# Altium PCB BMS-6S-1B_PCB.PcbDoc
Units mil, origin at the board's own origin, x right, y up, seen from the top; angles counter-clockwise.
Board outline 2373.06 x 1980.17 mil, 2 copper layers (Top Layer, Bottom Layer); 61 components, 44 nets, 186 pads, 345 vias.
Unrouted connection lines stored in the file: 3.
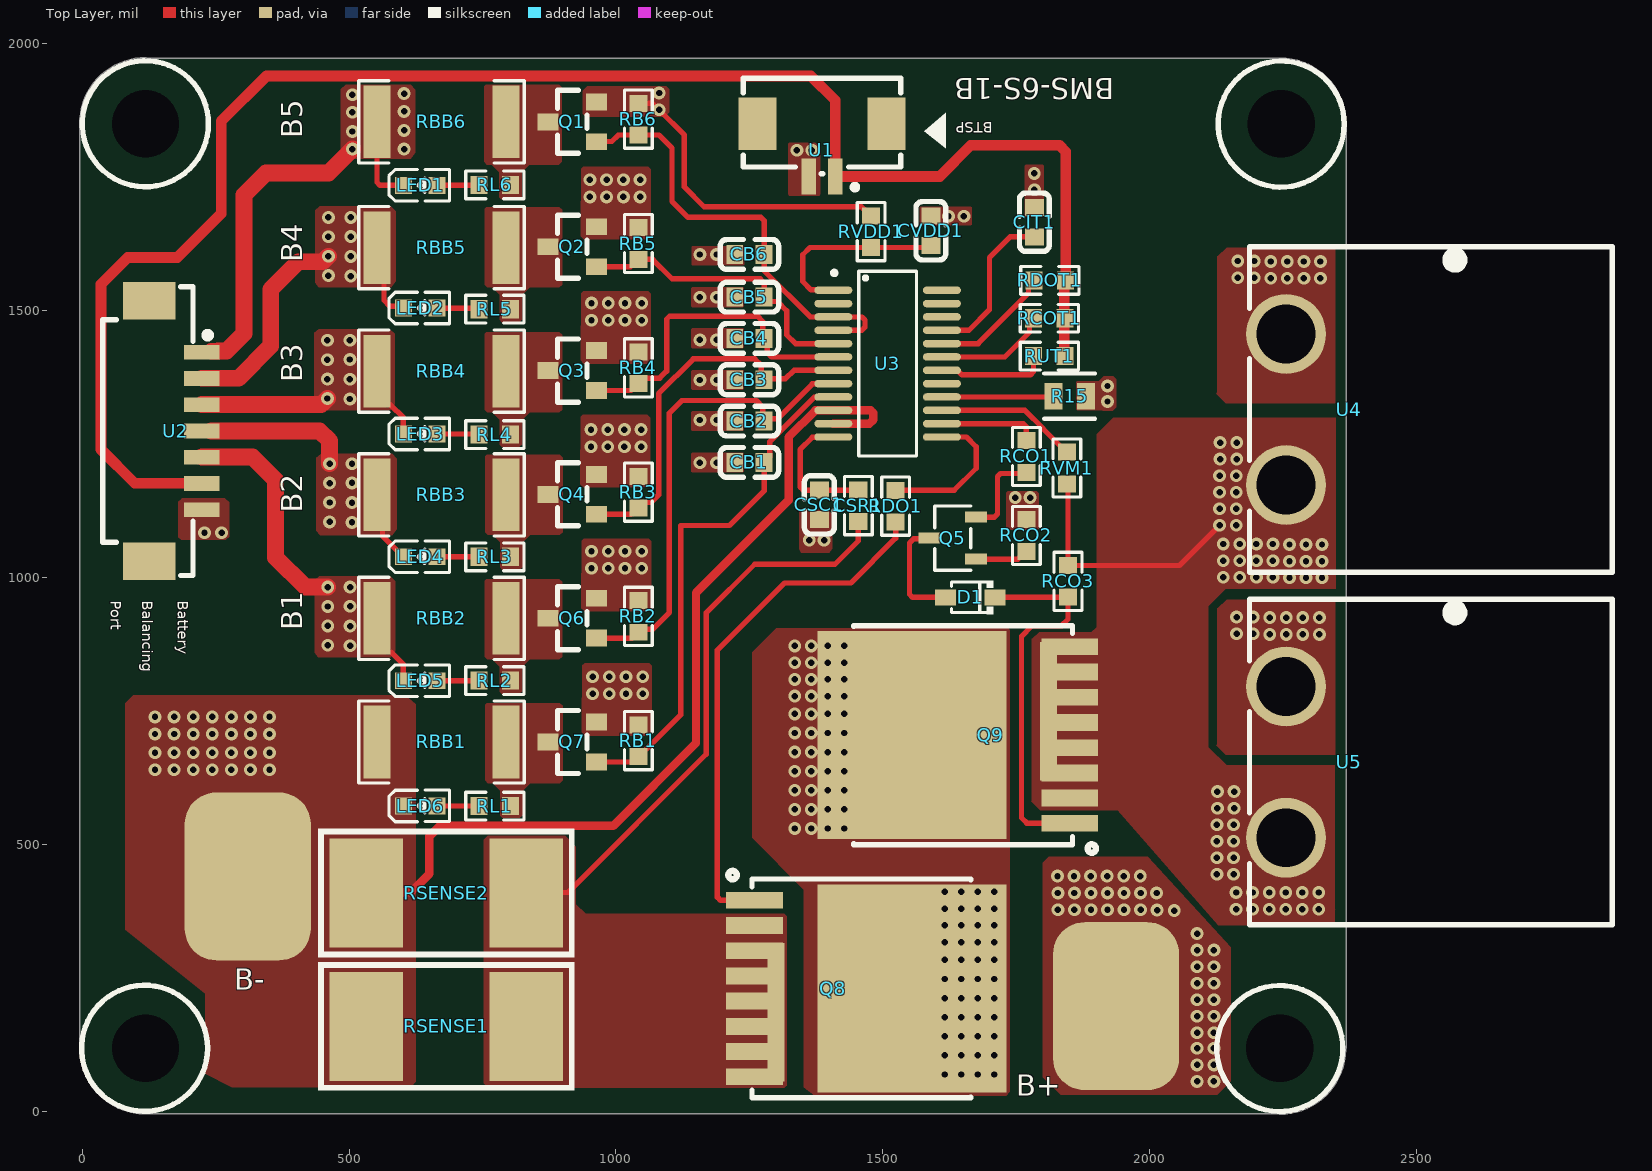
[diagram p0: Top Layer view]
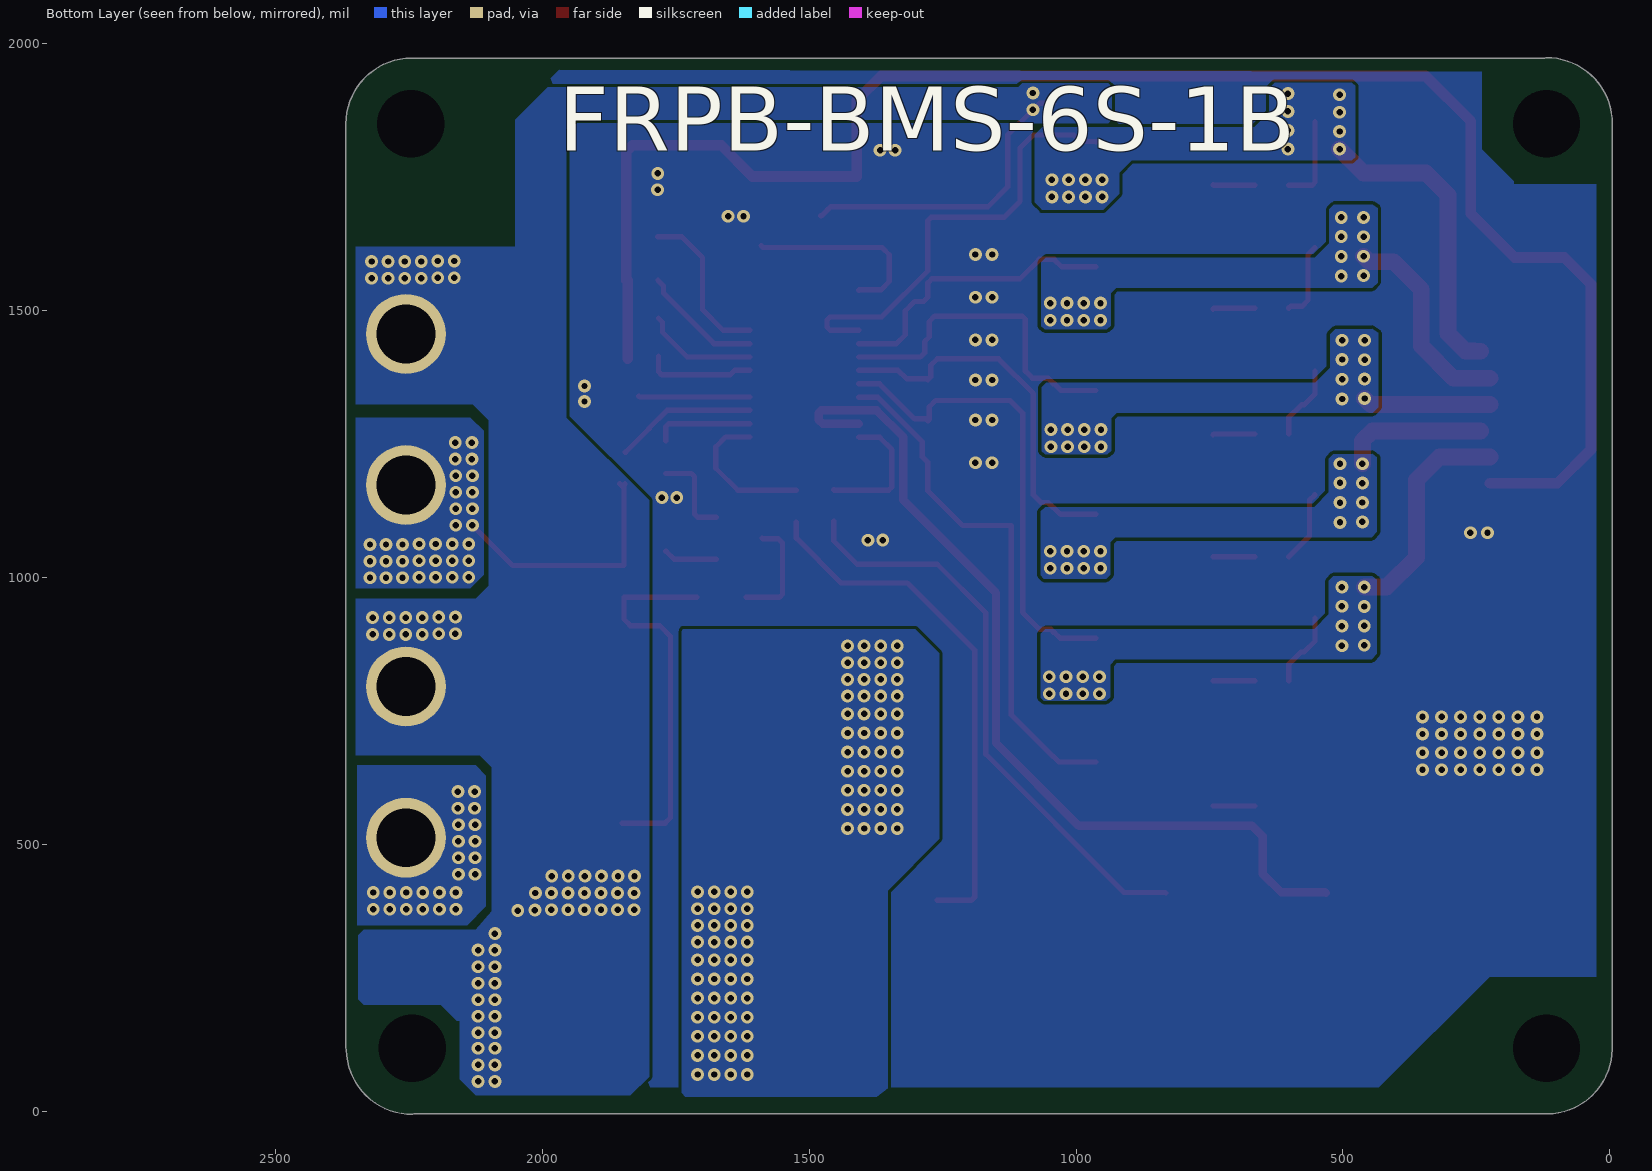
[diagram p1: Bottom Layer view, seen from below]

## Layer stack, top to bottom
Top Solder: solder mask 0.4, Solder Resist, Dk 3.5
Top Layer: signal copper 1.4
Dielectric 1: dielectric 12.6, FR-4, Dk 4.8
Bottom Layer: signal copper 1.4
Bottom Solder: solder mask 0.4, Solder Resist, Dk 3.5

## Board outline
116.75,-4.83 cw(c118.11,118.11) -4.83,116.75 -5.01,118.11 -5.01,1850.39 -4.84,1851.72 cw(c118.11,1851.39) 119.03,1974.34 121.74,1973.52 2244.09,1973.52 2245.42,1973.34 cw(c2245.09,1850.39) 2368.04,1850.39 2368.02,1849.04 2368.01,118.11 2367.02,115.12 cw(c2244.09,117.11) 2243.18,-5.83 2240.47,-5.01

## Design rules (kind name [scope] priority, off if disabled: settings)
Clearance [All] p1: gap=6 ignorepadtopadclearanceinfootprint=TRUE
HoleSize [All] p1: absolutevalues=TRUE maxlimit=200 minlimit=1 maxpercent=80.000 minpercent=20.000
HoleToHoleClearance [All] p1: gap=3 allowstackedmicrovias=TRUE
MinimumSolderMaskSliver [All] p1: minsoldermaskwidth=3
PolygonConnect [All] p1: connectstyle=Direct reliefconductorwidth=10 reliefentries=4 polygonreliefangle="90 Angle" airgapwidth=10
RoutingVias [All] p1: holewidth=12.01 width=24.02 viastyle="Through Hole" minholewidth=12 minwidth=24 maxholewidth=28 maxwidth=50
SilkToSilkClearance [All] p1: silktosilkclearance=2
SilkToSolderMaskClearance [All] p1: minsilkscreentomaskgap=2 clearancetoexposedcopper=TRUE
SolderMaskExpansion [All] p1: expansion=2 istentingtop=TRUE
SupplyNets "Schematic Supply Nets" [InNet('GND')] p1: voltage=0.000
Width [All] p1: maxlimit=31.5 minlimit=10 preferedwidth=10
25 further rules are at their usual default settings.

## Components (designator, comment, footprint, x,y, rotation, side; value= is the part's Value field where it differs from the comment)
CB1 "100nF" C0603 1250,1216 r0 top
CB2 "100nF" C0603 1250,1293.4 r0 top
CB3 "100nF" C0603 1250,1370.8 r0 top
CB4 "100nF" C0603 1250,1448.2 r0 top
CB5 "100nF" C0603 1250,1525.6 r0 top
CB6 "100nF" C0603 1250,1605.6 r0 top (schematic designator CB5)
CIT1 "100nF" C0603 1784,1666 r270 top
CSC1 "100nF" C0603 1381,1136.44 r90 top
CSR1 "1kR" R0603#1 1454,1135 r90 top value=1k
CVDD1 "100nF" C0603 1590,1650 r270 top
D1 "1SS355_C8485" SOD-323_L1.8-W1.3-LS2.5-RD 1664,963 r180 top
LED1 "NCD0603O1" LED0603-RD#1 633,1735 r0 top
LED2 "NCD0603O1" LED0603-RD#2 633,1504.99 r0 top
LED3 "NCD0603O1" LED0603-RD#2 633,1269 r0 top
LED4 "NCD0603O1" LED0603-RD#2 633,1039 r0 top
LED5 "NCD0603O1" LED0603-RD#2 633,806.79 r0 top
LED6 "NCD0603O1" LED0603-RD#2 633,572 r0 top
Q1 "AO3401A_C15127" SOT-23_L2.9-W1.3-P1.90-LS2.4-BR#1 918,1854 r0 top
Q2 "AO3401A_C15127" SOT-23_L2.9-W1.3-P1.90-LS2.4-BR#2 918,1620 r0 top
Q3 "AO3401A_C15127" SOT-23_L2.9-W1.3-P1.90-LS2.4-BR#3 918,1388 r0 top
Q4 "AO3401A_C15127" SOT-23_L2.9-W1.3-P1.90-LS2.4-BR#3 918,1156 r0 top
Q5 "2N5401S" SOT-23-3_L2.9-W1.5-P2.0-LS2.5-BR 1631,1074 r0 top
Q6 "AO3401A_C15127" SOT-23_L2.9-W1.3-P1.90-LS2.4-BR#2 918,924 r0 top
Q7 "AO3401A_C15127" SOT-23_L2.9-W1.3-P1.90-LS2.4-BR#3 918,692 r0 top
Q8 "IPLU250N04S4-1R7" PG-HSOF-8_L10.5-W10.1-P1.20-LS11.9-TL 1407.36,230.01 r0 top
Q9 "IPLU250N04S4-1R7" PG-HSOF-8_L10.5-W10.1-P1.20-LS11.9-TL 1702.64,704.99 r180 top
R15 "10kR" FP-ESR10-IPC_C 1850,1340 r0 top
RB1 "470R" R0603#1 1042,694.34 r270 top value=470
RB2 "470R" R0603#1 1042,927.27 r270 top value=470
RB3 "470R" R0603#1 1042,1160.2 r270 top value=470
RB4 "470R" R0603#1 1042,1393.14 r270 top value=470
RB5 "470R" R0603#1 1042,1626.07 r270 top value=470
RB6 "470R" R0603#1 1042,1859 r270 top value=470
RBB1 "47R" R2512 673,692 r0 top value=47
RBB2 "47R" R2512 673,923.6 r0 top value=47
RBB3 "47R" R2512 673,1155.2 r0 top value=47
RBB4 "47R" R2512 673,1386.8 r0 top value=47
RBB5 "47R" R2512 673,1618.4 r0 top value=47
RBB6 "47R" R2512 673,1854 r0 top value=47
RCO1 "1kR" R0603#1 1769,1227 r270 top value=1k
RCO2 "3.3MR" R0603#1 1769,1079 r270 top value=3.3M
RCO3 "3.3MR" R0603#1 1847,993 r270 top value=3.3M
RCOT1 "43kR" R0603#1 1812,1486 r0 top value=43k
RDO1 "1kR" R0603#1 1524,1134 r90 top value=1k
RDOT1 "22kR" R0603#1 1813,1557 r0 top value=22k
RL1 "100R" R0603#2 773,572 r0 top value=100
RL2 "100R" R0603#1 773,807 r0 top value=100
RL3 "100R" R0603#3 773,1039 r0 top value=100
RL4 "100R" R0603#3 773,1268 r0 top value=100
RL5 "100R" R0603#1 773,1503 r0 top value=100
RL6 "100R" R0603#1 773,1736 r0 top value=100
RSENSE1 "4mR" R3920 682,159 r0 top value=4m
RSENSE2 "4mR" R3920 682,409 r0 top value=4m
RUT1 "360kR" R0603#1 1812,1415 r0 top value=360k
RVDD1 "1kR" R0603#3 1478,1648.34 r90 top value=1k
RVM1 "200kR" R0603#1 1845,1205.34 r90 top value=200k
U1 "WAFER-MX1.25-2PWB" CONN-SMD_2P-P1.25_XUNPU_WAFER-MX1.25-2PWB 1386,1801 r180 top
U2 "ZX-MX1.25-7PWT" CONN-SMD_7P-P1.25_ZX-MX1.25-7PWT 174.8,1274.64 r90 top
U3 "CW1274ALBS" SSOP-24_L8.7-W3.9-P0.64-LS6.0-BL 1509,1401 r270 top
U4 "XT60PW-F" TH_2P-XT60PW-F 2373.89,1315 r270 top
U5 "XT60PW-F" TH_2P-XT60PW-F 2373.89,654.25 r270 top

## Footprints (in the part's own frame and the unit in brackets; to place one, negate y for a bottom-side part, rotate by r counter-clockwise, add the part's x,y. Pads: shape width x height; smd on the part's side, far side on the other; paste and mask are expansions set on the pad)
C0603 [mm]
  rect 0.8x0.9 smd mask+0.025: 1(-0.7,0) 2(0.7,0)
  silkscreen extent -1.39,-0.71 1.39,0.71
CONN-SMD_2P-P1.25_XUNPU_WAFER-MX1.25-2PWB [mm]
  rect 0.7x1.7 smd paste+0 mask+0.05: 1(-0.625,1.25) 2(0.625,1.25)
  rect 1.8x2.5 smd paste+0 mask+0.05: 3(3.075,-1.25) 4(-3.075,-1.25)
  silkscreen extent -3.75,-3.43 3.75,1.88
CONN-SMD_7P-P1.25_ZX-MX1.25-7PWT [mm]
  rect 0.7x1.7 smd paste+0 mask+0.05: 1(3.75,-1.25) 2(2.5,-1.25) 3(1.25,-1.25) 4(0,-1.25) 5(-1.25,-1.25) 6(-2.5,-1.25) 7(-3.75,-1.25)
  rect 1.8x2.5 smd paste+0 mask+0.05: 8(-6.2,1.25) 9(6.2,1.25)
  silkscreen extent -6.88,-1.67 6.87,3.48
FP-ESR10-IPC_C [mil]
  rect 33.79x49.69 smd paste+0 mask+0: 1(-30.59,0) 2(30.59,0)
  silkscreen extent -47,-42 47,42, body extent -51,-31 51,31, height 10
LED0603-RD#1 [mm]
  rect 0.8x0.8 smd mask+0.051: 1(-0.799,0)
  rect 0.8x0.8 smd mask+0.025: 2(0.799,0)
  silkscreen extent -1.49,-0.75 1.39,0.76
LED0603-RD#2 [mm]
  rect 0.8x0.8 smd mask+0.025: 1(-0.799,0) 2(0.799,0)
  silkscreen extent -1.49,-0.75 1.39,0.76
PG-HSOF-8_L10.5-W10.1-P1.20-LS11.9-TL [mm]
  rect 2.7x0.8 smd paste-100 mask+0.051: 1(-3.75,4.2) 2(-3.75,3) 3(-3.75,1.8) 4(-3.75,0.6) 5(-3.75,-0.6) 6(-3.75,-1.8) 7(-3.75,-3) 8(-3.75,-4.2)
  rect 0.8x6.6 smd paste-100 mask+0.051: 8(-2.734,-1.134)
  rect 9x9.9 smd paste-100 mask+0.051: 9(3.75,0)
  silkscreen extent -5,-5.2 6.54,5.6
R0603#1 [mil]
  rect 31.75x34.02 smd paste-3937.01 mask+2: 1(-29.66,0) 2(29.66,0)
  silkscreen extent -55,-26 55,26
R0603#2 [mil]
  rect 31.75x34.02 smd paste-3937.01 mask+2: 1(-29.66,0)
  rect 31.75x34.02 smd paste-3937.01 mask+3: 2(29.66,0)
  silkscreen extent -55,-26 55,26
R0603#3 [mil]
  rect 31.75x34.02 smd paste-3937.01 mask+1: 1(-29.66,0)
  rect 31.75x34.02 smd paste-3937.01 mask+2: 2(29.66,0)
  silkscreen extent -55,-26 55,26
R2512 [mil]
  rect 50.49x136.06 smd paste-3937.01 mask+2: 1(-120.72,0) 2(120.72,0)
  silkscreen extent -155,-77 155,77
R3920 [mm]
  rect 3.5x5.2 smd mask+0.025: 1(-3.81,0) 2(3.81,0)
  silkscreen extent -6.1,-3.05 6.1,3.05
SOD-323_L1.8-W1.3-LS2.5-RD [mm]
  rect 1x0.75 smd mask+0.025: 1(-1.173,0) 2(1.173,0)
  silkscreen extent -1.08,-0.8 0.9,0.8
SOT-23-3_L2.9-W1.5-P2.0-LS2.5-BR [mm]
  rect 1.037x0.532 smd mask+0.025: 1(1.101,-1) 2(1.101,1) 3(-1.101,0)
  silkscreen extent -0.86,-1.53 0.86,1.53
SOT-23_L2.9-W1.3-P1.90-LS2.4-BR#1 [mm]
  rect 1x0.8 smd mask+0.025: 1(1.15,-0.95) 2(1.15,0.95)
  rect 1x0.8 smd: 3(-1.15,0)
  silkscreen extent -0.7,-1.5 0.7,1.5
SOT-23_L2.9-W1.3-P1.90-LS2.4-BR#2 [mm]
  rect 1x0.8 smd mask+0.025: 1(1.15,-0.95) 2(1.15,0.95)
  rect 1x0.8 smd mask+0.076: 3(-1.15,0)
  silkscreen extent -0.7,-1.5 0.7,1.5
SOT-23_L2.9-W1.3-P1.90-LS2.4-BR#3 [mm]
  rect 1x0.8 smd mask+0.025: 1(1.15,-0.95) 2(1.15,0.95) 3(-1.15,0)
  silkscreen extent -0.7,-1.5 0.7,1.5
SSOP-24_L8.7-W3.9-P0.64-LS6.0-BL [mil]
  oval 14x71.06 smd: 1(-137.5,-101.77) 2(-112.5,-101.77) 3(-87.5,-101.77) 4(-62.5,-101.77) 5(-37.5,-101.77) 6(-12.5,-101.77) 7(12.5,-101.77) 8(37.5,-101.77) 9(62.5,-101.77) 10(87.5,-101.77) 11(112.5,-101.77) 12(137.5,-101.77) 13(137.5,101.77) 14(112.5,101.77) 15(87.5,101.77) 16(62.5,101.77) 17(37.5,101.77) 18(12.5,101.77) 19(-12.5,101.77) 20(-37.5,101.77) 21(-62.5,101.77) 22(-87.5,101.77) 23(-112.5,101.77) 24(-137.5,101.77)
  silkscreen extent -174,-104 173,54
TH_2P-XT60PW-F [mm]
  oval 1.3x2.2 on Mech1 paste-2539.97 mask+0.05: 1(-6.75,3) 2(6.75,3)
  round 3.8 hole 2.8 paste-2539.97 mask+0.05: 3(-3.6,-3) 4(3.6,-3)
  silkscreen extent -7.75,-4.75 7.75,12.52

## Part data
CB1 CB2 CB3 CB4 CB5 CB6 CIT1 CSC1 CVDD1: library part CMP-003-000004-1, JLCPCB Part Class="Extended Part", LCSC Part Name="100nF ?0% 50V", Manufacturer=muRata(村田), Manufacturer Part=GCJ188R71H104KA12D, Temperature Coefficient=X7R, Tolerance=10%, Voltage Rating=50V, Add into BOM=yes, Convert to PCB=yes, Datasheet=https://item.szlcsc.com/datasheet/GCJ188R71H104KA12D/172496.html, Design Item ID=GCJ188R71H104KA12D, Device=GCJ188R71H104KA12D, Source=ESM-111A.SchLib, Supplier Footprint=0603, Supplier Part=C161115, Symbol=GCJ188R71H104KA12D
CSR1 RVDD1: library part CMP-005-000004-1, JLCPCB Part Class="Basic Part", LCSC Part Name="1kO ?% 100mW ????", Manufacturer=UNI-ROYAL(厚声), Manufacturer Part=0603WAF1001T5E, Operating Temperature=-55℃~+155℃, Power(Watts)=100mW, Temperature Coefficient=?00ppm/?, Tolerance=1%, Voltage-Supply(Max)=75V, Add into BOM=yes, Convert to PCB=yes, Datasheet=https://item.szlcsc.com/datasheet/0603WAF1001T5E/21904.html, Design Item ID=0603WAF1001T5E, Device=0603WAF1001T5E, Source=ESM-111A.SchLib, Supplier Footprint=0603, Supplier Part=C21190, Symbol=0603WAF1001T5E, Type="Thick Film Resistor"
D1: library part CMP-007-000001-1, Current - Rectified=100mA, JLCPCB Part Class="Extended Part", LCSC Part Name=1SS355, Manufacturer=CJ(江苏长电/长晶), Non-Repetitive Peak Forward Surge Current=500mA, Operating Junction Temperature Range=-, Reverse Leakage Current (Ir)=100nA@80V, Voltage - DC Reverse(Vr)=80V, Voltage - Forward(Vf@If)=1.2V@100mA, Add into BOM=yes, Convert to PCB=yes, Datasheet=https://item.szlcsc.com/datasheet/1SS355/8979.html, Design Item ID=1SS355_C8485, Device=1SS355_C8485, Diode Configuration=Independent, Manufacturer Part=1SS355, Reverse Recovery Time (trr)=4ns, Source=ESM-111A.SchLib, Supplier Footprint=SOD-323, Supplier Part=C8485, Symbol=1SS355_C8485
LED1 LED2 LED3 LED4 LED5 LED6: library part CMP-008-000000-1, Emitted Color=Orange, Forward Current=20mA, Forward Voltage (VF)=1.6V~2.6V, JLCPCB Part Class="Extended Part", Lens Color=无色透明透镜, Manufacturer=国星光电, Operating Temperature=-30℃~+85℃, Power Dissipation=65mW, Add into BOM=yes, Convert to PCB=yes, Datasheet=https://atta.szlcsc.com/upload/public/pdf/source/20200820/C84269_76D7AD616B091E5B61CAF71BD9DDF26F.pdf, Design Item ID=NCD0603O1, Device=NCD0603O1, Dominant Wavelength=600nm~610nm, LCSC Part Name=NCD0603O1, Luminous Intensity=80mcd~220mcd, Manufacturer Part=NCD0603O1, Source=ESM-111A.SchLib, Supplier Footprint=0603, Supplier Part=C84269, Symbol=FC-D1608HOK-600H, Viewing Angle=130皘ISIMPORTED=TRUE
Q1 Q2 Q3 Q4 Q6 Q7: library part CMP-003-000001-1, Current - Continuous Drain(Id)=4A, Drain to Source Voltage=30V, Gate Threshold Voltage (Vgs(th))=900mV@250uA, Input Capacitance(Ciss)=645pF, JLCPCB Part Class="Basic Part", LCSC Part Name="1个P沟道 耐压:30V 电流:4A", Manufacturer=AOS, Manufacturer Part=AO3401A, Operating Temperature=-, Output Capacitance(Coss)=80pF, Reverse Transfer Capacitance (Crss@Vds)=55pF, Add into BOM=yes, Convert to PCB=yes, Datasheet=https://item.szlcsc.com/datasheet/AO3401A/15801.html, Design Item ID=AO3401A_C15127, Device=AO3401A_C15127, Gate Charge(Qg)=14nC@10V, Number="1 P-Channel", Pd - Power Dissipation=-, RDS(on)=47mΩ@10V；85mΩ@2.5V；60mΩ@4.5V, Source=ESM-111A.SchLib, Supplier Footprint=SOT-23, Supplier Part=C15127, Symbol=AO3401A, Type=-
Q5: library part CMP-003-000000-1, Collector - Emitter Voltage VCEO=160V, Current - Collector Cutoff=50nA, Current - Collector(Ic)=600mA, DC Current Gain=300@10mA,5V, Emitter-Base Voltage(Vebo)=6V, JLCPCB Part Class="Extended Part", LCSC Part Name=PNP开关晶体管, Manufacturer="TECH PUBLIC(台舟)", Pd - Power Dissipation=300mW, Transition frequency(fT)=300MHz, Add into BOM=yes, Convert to PCB=yes, Datasheet=https://item.szlcsc.com/datasheet/2N5401S/8170936.html, Design Item ID=2N5401S, Device=2N5401S, Manufacturer Part=2N5401S, Source=ESM-111A.SchLib, Supplier Footprint=SOT-23, Supplier Part=C7202978, Symbol=2N5401S, Vce Saturation(VCE(sat))=500mV@50mA,6mA
Q8 Q9: library part CMP-003-000003-1, Current - Continuous Drain(Id)=250A, Drain to Source Voltage=40V, Gate Threshold Voltage (Vgs(th))=4V@80uA, Input Capacitance(Ciss)=7.9nF, JLCPCB Part Class="Extended Part", LCSC Part Name=OptiMOS-T2功率晶体管, Manufacturer=Infineon(英飞凌), Operating Temperature=-55℃~+175℃, Output Capacitance(Coss)=1.8nF, Pd - Power Dissipation=188W, Reverse Transfer Capacitance (Crss@Vds)=105pF, Add into BOM=yes, Convert to PCB=yes, Datasheet=https://item.szlcsc.com/datasheet/IPLU250N04S4-1R7/557481.html, Design Item ID=IPLU250N04S4-1R7, Device=IPLU250N04S4-1R7, Gate Charge(Qg)=100nC@10V, Manufacturer Part=IPLU250N04S4-1R7, Number="1 N-Channel", RDS(on)=1.7mΩ@10V, Source=ESM-111A.SchLib, Supplier Footprint=HSOF-8, Supplier Part=C537068, Symbol=IPLU250N04S4-1R7, Type=N-Channel
R15: library part CMP-08839-028179-1, "10kO ?.5% 0.4W 0805 Anti-Surge Chip Resistor AEC-Q200", RoHS Compliant=Yes
RB1 RB2 RB3 RB4 RB5 RB6: library part CMP-005-000010-1, JLCPCB Part Class="Basic Part", LCSC Part Name="470O ?% 100mW ????", Manufacturer=UNI-ROYAL(厚声), Manufacturer Part=0603WAF4700T5E, Operating Temperature=-55℃~+155℃, Power(Watts)=100mW, Temperature Coefficient=?00ppm/?, Tolerance=1%, Voltage-Supply(Max)=75V, Add into BOM=yes, Convert to PCB=yes, Datasheet=https://item.szlcsc.com/datasheet/0603WAF4700T5E/23906.html, Design Item ID=0603WAF4700T5E, Device=0603WAF4700T5E, Source=ESM-111A.SchLib, Supplier Footprint=0603, Supplier Part=C23179, Symbol=0603WAF4700T5E, Type="Thick Film Resistor"
RBB1 RBB2 RBB3 RBB4 RBB5 RBB6: library part CMP-005-000003-1, JLCPCB Part Class="Extended Part", LCSC Part Name="???? 47O ?% 1W", Manufacturer=FH(风华), Manufacturer Part=RC-12K47R0FT, Operating Temperature=-55℃~+155℃, Power(Watts)=1W, Temperature Coefficient=?00ppm/?, Tolerance=1%, Voltage-Supply(Max)=200V, Add into BOM=yes, Convert to PCB=yes, Datasheet=https://item.szlcsc.com/datasheet/RC-12K47R0FT/455959.html, Design Item ID=RC-12K47R0FT, Device=RC-12K47R0FT, Source=ESM-111A.SchLib, Supplier Footprint=2512, Supplier Part=C454019, Symbol=RC-12K47R0FT, Type="Thick Film Resistor"
RCO1 RDO1: library part CMP-005-000015-1, JLCPCB Part Class="Basic Part", LCSC Part Name="1kO ?% 100mW ????", Manufacturer=UNI-ROYAL(厚声), Manufacturer Part=0603WAF1001T5E, Operating Temperature=-55℃~+155℃, Power(Watts)=100mW, Temperature Coefficient=?00ppm/?, Tolerance=1%, Voltage-Supply(Max)=75V, Add into BOM=yes, Convert to PCB=yes, Datasheet=https://item.szlcsc.com/datasheet/0603WAF1001T5E/21904.html, Design Item ID=0603WAF1001T5E, Device=0603WAF1001T5E, Source=ESM-111A.SchLib, Supplier Footprint=0603, Supplier Part=C21190, Symbol=0603WAF1001T5E, Type="Thick Film Resistor"
RCO2 RCO3: library part CMP-005-000018-1, JLCPCB Part Class="Extended Part", LCSC Part Name="3.3MO ?% 100mW ????", Manufacturer=UNI-ROYAL(厚声), Manufacturer Part=0603WAF3304T5E, Operating Temperature=-55℃~+155℃, Power(Watts)=100mW, Temperature Coefficient=?00ppm/?, Tolerance=1%, Voltage-Supply(Max)=75V, Add into BOM=yes, Convert to PCB=yes, Datasheet=https://item.szlcsc.com/datasheet/0603WAF3304T5E/26839.html, Design Item ID=0603WAF3304T5E, Device=0603WAF3304T5E, Source=ESM-111A.SchLib, Supplier Footprint=0603, Supplier Part=C26096, Symbol=0603WAF3304T5E, Type="Thick Film Resistor"
RCOT1: library part CMP-005-000009-1, JLCPCB Part Class="Extended Part", LCSC Part Name="43kO ?% 100mW ????", Manufacturer=UNI-ROYAL(厚声), Manufacturer Part=0603WAF4302T5E, Operating Temperature=-55℃~+155℃, Power(Watts)=100mW, Temperature Coefficient=?00ppm/?, Tolerance=1%, Voltage-Supply(Max)=75V, Add into BOM=yes, Convert to PCB=yes, Datasheet=https://item.szlcsc.com/datasheet/0603WAF4302T5E/23899.html, Design Item ID=0603WAF4302T5E, Device=0603WAF4302T5E, Source=ESM-111A.SchLib, Supplier Footprint=0603, Supplier Part=C23172, Symbol=0603WAF4302T5E, Type="Thick Film Resistor"
RDOT1: library part CMP-005-000006-1, JLCPCB Part Class="Basic Part", LCSC Part Name="22kO ?% 100mW ????", Manufacturer=UNI-ROYAL(厚声), Manufacturer Part=0603WAF2202T5E, Operating Temperature=-55℃~+155℃, Power(Watts)=100mW, Temperature Coefficient=?00ppm/?, Tolerance=1%, Voltage-Supply(Max)=75V, Add into BOM=yes, Convert to PCB=yes, Datasheet=https://item.szlcsc.com/datasheet/0603WAF2202T5E/32812.html, Design Item ID=0603WAF2202T5E, Device=0603WAF2202T5E, Source=ESM-111A.SchLib, Supplier Footprint=0603, Supplier Part=C31850, Symbol=0603WAF2202T5E, Type="Thick Film Resistor"
RL1 RL2 RL3 RL4 RL5 RL6: library part CMP-005-000012-1, JLCPCB Part Class="Extended Part", LCSC Part Name="???? 100O ?% 100mW", Manufacturer=YAGEO(国巨), Manufacturer Part=RC0603FR-07100RL, Operating Temperature Range=-55℃~+155℃, Temperature Coefficient=?00ppm/?, Tolerance=1%, Add into BOM=yes, Convert to PCB=yes, Datasheet=https://atta.szlcsc.com/upload/public/pdf/source/20180316/70C0E2BDAE7FCC62C531A5A58D202EE1.pdf, Design Item ID=RC0603FR-07100RL, Device=RC0603FR-07100RL, Source=ESM-111A.SchLib, Supplier Footprint=0603, Supplier Part=C105588, Symbol=RC0603FR-07100RL, Type="Thick Film Resistors"
RSENSE1 RSENSE2: library part CMP-005-000013-1, JLCPCB Part Class="Extended Part", LCSC Part Name="4mO ?% 3W", Manufacturer=Milliohm(毫欧), Manufacturer Part=HolRS3920-3W-4mR-1%, Tolerance=1%, Add into BOM=yes, Convert to PCB=yes, Datasheet=https://atta.szlcsc.com/upload/public/pdf/source/20200522/C558625_7915B34B9186274EB7EA9862EBA9CEA8.pdf, Design Item ID=HolRS3920-3W-4mR-1%, Device=HolRS3920-3W-4mR-1%, Source=ESM-111A.SchLib, Supplier Footprint=3920, Supplier Part=C558632, Symbol=HOLRS3920-3W-4MR-1%
RUT1: library part CMP-005-000008-1, JLCPCB Part Class="Extended Part", LCSC Part Name="360kO ?% 100mW ????", Manufacturer=UNI-ROYAL(厚声), Manufacturer Part=0603WAF3603T5E, Operating Temperature=-55℃~+155℃, Power(Watts)=100mW, Temperature Coefficient=?00ppm/?, Tolerance=1%, Voltage-Supply(Max)=75V, Add into BOM=yes, Convert to PCB=yes, Datasheet=https://item.szlcsc.com/datasheet/0603WAF3603T5E/23873.html, Design Item ID=0603WAF3603T5E, Device=0603WAF3603T5E, Source=ESM-111A.SchLib, Supplier Footprint=0603, Supplier Part=C23146, Symbol=0603WAF3603T5E, Type="Thick Film Resistor"
RVM1: library part CMP-005-000016-1, JLCPCB Part Class="Basic Part", LCSC Part Name="200kO ?% 100mW ????", Manufacturer=UNI-ROYAL(厚声), Manufacturer Part=0603WAF2003T5E, Operating Temperature Range=-55℃~+155℃, Temperature Coefficient=?00ppm/?, Tolerance=1%, Add into BOM=yes, Convert to PCB=yes, Datasheet=https://atta.szlcsc.com/upload/public/pdf/source/20200306/C422600_1E6D84923E4A46A82E41ADD87F860B5C.pdf, Design Item ID=0603WAF2003T5E, Device=0603WAF2003T5E, Source=ESM-111A.SchLib, Supplier Footprint=0603, Supplier Part=C25811, Symbol=0603WAF2003T5E, Type="Thick Film Resistors"
U1: library part CMP-003-000017-1, Color=Beige, Current Rating=1A, Flame Retardant Rating=-, JLCPCB Part Class="Extended Part", LCSC Part Name="1x2P 间距:1.25mm 卧贴 系列:PicoBlade(MX 1.25)", Manufacturer=XUNPU(讯普), Operating Temperature=-25℃~+85℃, Voltage Rating=125V, Add into BOM=yes, Contact Material=Brass, Contact Plating=Tin, Convert to PCB=yes, Datasheet=https://item.szlcsc.com/datasheet/WAFER-MX1.25-2PWB/3561371.html, Design Item ID=WAFER-MX1.25-2PWB, Device=WAFER-MX1.25-2PWB, Manufacturer Part=WAFER-MX1.25-2PWB, Mounting Type="Surface Mount, Right Angle", Number of Pins=2P, Number of PINs Per Row=2, Number of Rows=1, Pins Structure=1x2P, Pitch=1.25mm, Plastic Material=LCP, Reference Series="PicoBlade(MX 1.25)", Row Spacing=-, Source=ESM-111A.SchLib, Supplementary Features="Auxiliary Solder Pin", Supplier Footprint=SMD,P=1.25mm,卧贴, Supplier Part=C3029359, Symbol=WAFER-MX1.25-2PWB, X-Length of Bottom Edge on Board (Spacing Line)=7.5mm, Y-Width of Bottom Edge on Board=5.25mm, Z-Height of the Board=3.6mm
U2: library part CMP-003-000002-1, Color=Beige, Current Rating=1A, Flame Retardant Rating=-, JLCPCB Part Class="Extended Part", LCSC Part Name="1x7P 间距:1.25mm 卧贴 系列:PicoBlade(MX 1.25)", Manufacturer=Megastar(兆星), Operating Temperature=-25℃~+85℃, Voltage Rating=125V, Add into BOM=yes, Contact Material=Brass, Contact Plating=Tin, Convert to PCB=yes, Datasheet=https://item.szlcsc.com/datasheet/ZX-MX1.25-7PWT/20550391.html, Design Item ID=ZX-MX1.25-7PWT, Device=ZX-MX1.25-7PWT, Manufacturer Part=ZX-MX1.25-7PWT, Mounting Type="Surface Mount, Right Angle", Number of Pins=7P, Number of PINs Per Row=7, Number of Rows=1, Pins Structure=1x7P, Pitch=1.25mm, Plastic Material=LCP, Reference Series="PicoBlade(MX 1.25)", Row Spacing=-, Source=ESM-111A.SchLib, Supplementary Features="Auxiliary Solder Pin", Supplier Footprint=SMD,P=1.25mm,卧贴, Supplier Part=C19272380, Symbol=ZX-MX1.25-7PWT, X-Length of Bottom Edge on Board (Spacing Line)=13.75mm, Y-Width of Bottom Edge on Board=5.25mm, Z-Height of the Board=3.6mm
U3: library part CMP-003-000022-1, JLCPCB Part Class="Extended Part", Add into BOM=yes, Convert to PCB=yes, Datasheet=https://atta.szlcsc.com/upload/public/pdf/source/20210825/C2688819_42BA714DCD7637B3574D4658BF7F6BA0.pdf, Design Item ID=CW1274ALBS, Device=CW1274ALBS, LCSC Part Name=CW1274ALBS, Manufacturer Part=CW1274ALBS, Source=ESM-111A.SchLib, Supplier Footprint=SSOP-24-150mil, Supplier Part=C2688819, Symbol=CW1274ALBS
U4 U5: library part CMP-003-000021-1, Colour=Yellow, contact resistance=-, JLCPCB Part Class="Extended Part", LCSC Part Name="AMASS(艾迈斯)插头连接器锂电池组充电接口 航模电调卧式焊板 母头 XT60PW-F", Manufacturer=AMASS(艾迈斯), Add into BOM=yes, Belt length=-, Convert to PCB=yes, Datasheet=https://item.szlcsc.com/datasheet/XT60PW-F/423834.html, Design Item ID=XT60PW-F, Device=XT60PW-F, FlameRetardantGrade=-, Input=-, InsulationMaterial=-, Interface=-, InterfaceType=Female, Manufacturer Part=XT60PW-F, MaximumCurrent=-, MetalMaterial=-, NumberOfUSBHoles=-, Output=-, Power=-, RatedCurrent=-, RatedVoltage=-, RecommendedWireGauge=-, Size=-, Source=ESM-111A.SchLib, specifications=-, Supplier Footprint=-, Supplier Part=C428722, Symbol=XT60PW-F_C428722, Type="Horizontal plug", Type1=-

## Free pads (board coordinates)
  round 0 hole 125.98 unplated mask+0: 2(118.11,118.11) 2(118.11,1850.39) 2(2243.89,118.11) 2(2246.39,1850.39)
  rrect50% 236.22x314.96 smd mask+2: 6(310,440) 6(1937,197)

## Via types
v1: diameter 24, hole 12, Top Layer to Bottom Layer, tented both sides, 345 vias

## Nets (pads, with @x,y where several pads share a name; then routed paths per layer and width w, separated by ;. In a path a pad name is that pad's centre, name@x,y a point inside that pad or via, vN(x,y) a via of type N, cw(c..) or ccw(c..) an arc to the next point about the centre after c; other vN are vias at no path point)
GND: CB1.1 CB2.1 CB3.1 CB4.1 CB5.1 CB6.1 CIT1.1 CSC1.1 CVDD1.1 LED6.1 pad.6@310,440 R15.2 RBB1.1 RCO2.1 RSENSE1.1 RSENSE2.1 U1.2 U2.7 U3.10 U3.11 | length 1692.7
  Top Layer w15.75: RSENSE2.1 533.29,410.29 615.29,410.29 650,445 650,515 670,535 995,535 1150,690 1150,971.59 1323.38,1144.97 1323.38,1263.38 1373.5,1313.5 U3.10 1415.58,1313.5 1477,1313.5 1481.98,1308.52 1481.98,1295.48 1475,1288.5 U3.11
  other v1: 136.11,640 171.89,640 207.67,640 243.44,640 279.22,640 315,640 350.78,640 136.11,672 171.89,672 207.67,672 243.44,672 279.22,672 315,672 350.78,672 136.11,707 171.89,707 207.67,707 243.44,707 279.22,707 315,707 350.78,707 136.11,739 171.89,739 207.67,739 243.44,739 279.22,739 315,739 350.78,739 1362.14,1070.4 1390,1070 229,1084 261,1084 1748,1150 1776,1150 1157.14,1215.4 1188.47,1215.4 1157.14,1295.4 1188.47,1295.4 1921,1330 1921,1359 1157.14,1370.4 1188.47,1370.4 1157.14,1445.4 1188.47,1445.4 1157.14,1525.4 1188.47,1525.4 1157.14,1605.4 1188.47,1605.4 1623,1677 1652,1677 1784,1727 1783.6,1757.47 1339,1801 1367,1801
NetCB1_2: CB1.2 Q7.1 RB1.2 U3.9 | length 983
  Top Layer w10: Q7.1 1031.92,654.6 RB1.2 1043.13,664.68 1121.13,742.67 1121.13,1097.6 1212.6,1097.6 1277.56,1162.56 CB1.2 1288.31,1226.75 1288.31,1255 1371.04,1337.73 1406.46,1337.73 U3.9
NetCB2_2: CB2.2 Q6.1 RB2.2 U3.8 | length 906.3
  Top Layer w10: Q6.1 1029.85,886.6 1040.87,897.61 RB2.2@1042.73,897.61 ; RB2.2 1047.54,903.15 1068.15,903.15 1100,935 1100,1308.53 1123.45,1331.97 1263.03,1331.97 1274.74,1320.26 1274.74,1296.22 CB2.2 ; CB2.2@1277.56,1295.37 1279.64,1297.45 1302.45,1297.45 1368.04,1363.04 1406.77,1363.04 U3.8
NetCB3_2: CB3.2 Q4.1 RB3.2 U3.7 | length 711.4
  Top Layer w10: Q4.1 1028.92,1118.6 1040.87,1130.54 RB3.2 1052.28,1140.82 1065.82,1140.82 1080,1155 1080,1345 1145,1410 1260,1410 1272.34,1397.66 1272.34,1376.02 CB3.2 ; CB3.2@1277.56,1372.77 1317.77,1372.77 1333.5,1388.5 U3.7
NetCB4_2: CB4.2 Q3.1 RB4.2 U3.6 | length 620.7
  Top Layer w10: Q3.1 1027.99,1350.6 1040.87,1363.48 RB4.2@1043.13,1363.48 ; RB4.2 1052.31,1373.79 1081.79,1373.79 1095,1387 1095,1484.14 1100.86,1490 1265,1490 1274.94,1480.06 1274.94,1450.82 1283.66,1442.1 1283.66,1421.34 1291.5,1413.5 U3.6
NetCB5_2: CB5.2 Q2.1 RB5.2 U3.5 | length 558.3
  Top Layer w10: Q2.1 1027.06,1582.6 1040.87,1596.41 RB5.2@1043.13,1596.41 ; RB5.2 1068.59,1596.41 1105,1560 1270,1560 1277.54,1552.46 1277.54,1525.62 1285.61,1517.55 1302.45,1517.55 1320,1500 1320,1455 1336.5,1438.5 U3.5
NetCB6_2: CB6.2 Q1.1 RB6.2 U3.3 U3.4 | length 841
  Top Layer w10: Q1.1 963.78,1817.1 992.1,1817.1 1004.34,1829.34 RB6.2 1080.66,1829.34 1105,1805 1105,1705 1135,1675 1271.7,1675 1277.56,1669.14 CB6.2 1277.56,1575.07 1364.13,1488.5 U3.3 1407.42,1488.31 1460.83,1488.31 1466.69,1482.46 1466.69,1469.36 1460.83,1463.5 U3.4
NetCIT1_2: CIT1.2 U3.21 | length 303
  Top Layer w10: U3.21 1661.3,1463.5 1700,1502.2 1700,1600 1738.44,1638.44 CIT1.2
NetCSC1_2: CSC1.2 CSR1.2 U3.12 | length 253.8
  Top Layer w10: U3.12 1406.77,1263.04 1368.04,1263.04 1345,1240 1345,1169.86 1350.86,1164 1453.34,1164 CSR1.2
NetCSR1_1: CSR1.1 Q8.2 Q8.3 Q8.4 Q8.5 Q8.6 Q8.7 Q8.8 RSENSE1.2 RSENSE2.2 | length 1087
  Top Layer w10: RSENSE2.2 833.04,410.04 910.04,410.04 1169,669 1169,934 1260,1025 1410,1025 1454,1069 CSR1.1
NetCVDD1_2: CVDD1.2 RVDD1.1 U3.1 | length 361.3
  Top Layer w10: U3.1 1406.46,1539.27 1365.73,1539.27 1350,1555 1350,1605 1363.68,1618.68 RVDD1.1 1586.24,1618.68 CVDD1.2
NetD1_1: D1.1 Q9.1 RCO3.2 | length 713.1
  Top Layer w10: D1.1 1846.66,963 RCO3.2 1847,922 1835,910 1780,910 1760,890 1760,550 1770,540 1849.91,540 Q9.1
NetD1_2: D1.2 Q5.3 | length 207.8
  Top Layer w10: Q5.3 1586.72,1073.08 1558.08,1073.08 1550,1065 1550,968.86 1555.86,963 D1.2
NetLED1_1: LED1.1 Q2.2 RB5.1 RBB6.1 U2.1 | length 738.3
  Top Layer w10: RBB6.1 552.28,1740.85 558.14,1734.99 LED1.1
  Top Layer w31.5: U2.1@241.72,1424.25 253.73,1424.25 254.09,1424.61 270.55,1424.61 303,1457.06 303,1717 344.25,1758.25 461.25,1758.25 v1(506,1803)
  other v1: 951.14,1713.4 982.47,1713.4 1013.8,1713.4 1045.14,1713.4 951.14,1745.4 982.47,1745.4 1013.8,1745.4 1045.14,1745.4 603,1803 506,1836 603,1838 506,1872 603,1873.67 506,1905 603,1907
NetLED1_2: LED1.2 RL6.1 | length 79.3
  Top Layer w10: LED1.2 742.34,1735.01 RL6.1
NetLED2_1: LED2.1 Q3.2 RB4.1 RBB5.1 U2.2 | length 540.1
  Top Layer w10: RBB5.1 565.29,1605.39 565.29,1519.71 576.63,1508.37 598.15,1508.37 LED2.1
  Top Layer w31.5: U2.2@224.2,1373.43 292.43,1373.43 353,1434 353,1540 405,1592 450.67,1592 v1(461,1602.33)
  other v1: 954.14,1482.4 985.47,1482.4 1016.8,1482.4 1048.14,1482.4 954.14,1514.4 985.47,1514.4 1016.8,1514.4 1048.14,1514.4 503,1565 461,1566 503,1602 461,1638.67 503,1639 461,1675 503,1675
NetLED2_2: LED2.2 RL5.1 | length 79.7
  Top Layer w10: LED2.2 741.34,1505 RL5.1
NetLED3_1: LED3.1 Q4.2 RB3.1 RBB4.1 U2.3 | length 380.9
  Top Layer w10: RBB4.1 552.28,1344.01 572.53,1323.77 577.5,1323.77 601.53,1299.74 LED3.1
  Top Layer w31.5: U2.3@224.2,1324.22 447.82,1324.22 v1(459.27,1335.67)
  other v1: 953.14,1245.4 984.47,1245.4 1015.8,1245.4 1047.14,1245.4 953.14,1277.4 984.47,1277.4 1015.8,1277.4 1047.14,1277.4 501.27,1334.67 459.27,1372.01 501.27,1371.67 459.27,1408.34 501.27,1408.67 459.27,1444.67 501.27,1444.67
NetLED3_2: LED3.2 RL4.1 | length 79.3
  Top Layer w10: LED3.2 742.34,1269.01 RL4.1
NetLED4_1: LED4.1 Q6.2 RB2.1 RBB3.1 U2.4 | length 408.7
  Top Layer w10: RBB3.1@552.54,1155.2 562.49,1145.24 562.49,1078.03 LED4.1
  Top Layer w31.5: U2.4@241.72,1275 444.81,1275 463.26,1256.55 v1(463.26,1213.51)
  other v1: 954.14,1017.4 985.47,1017.4 1016.8,1017.4 1048.14,1017.4 954.14,1049.4 985.47,1049.4 1016.8,1049.4 1048.14,1049.4 505.26,1103.51 463.26,1104.51 463.26,1140.85 505.26,1140.51 463.26,1177.18 505.26,1177.51 505.26,1213.51
NetLED4_2: LED4.2 RL3.1 | length 78.9
  Top Layer w10: LED4.2 RL3.1
NetLED5_1: LED5.1 Q7.2 RB1.1 RBB2.1 U2.5 | length 562.1
  Top Layer w10: RBB2.1 552.28,880.82 572.53,860.57 578.49,860.57 601.53,837.53 LED5.1
  Top Layer w31.5: U2.5@224.22,1225.79 319.21,1225.79 362,1183 362,1038 417.74,982.26 v1(459.78,982.26)
  other v1: 956.14,782.4 987.47,782.4 1018.8,782.4 1050.14,782.4 956.14,814.4 987.47,814.4 1018.8,814.4 1050.14,814.4 501.78,872.26 459.78,873.26 501.78,909.26 459.78,909.59 459.78,945.93 501.78,946.26 501.78,982.26
NetLED5_2: LED5.2 RL2.1 | length 79
  Top Layer w10: LED5.2 743.13,806.79 RL2.1
NetLED6_2: LED6.2 RL1.1 | length 78.9
  Top Layer w10: LED6.2 RL1.1
NetQ1_2: pad.6@1937,197 Q1.2 RB6.1 RVDD1.2 U4.3 U5.3 | length 580.5
  Top Layer w10: RB6.1 1068.42,1888.66 1080.34,1876.74 v1(1080.74,1876.74) 1128,1829.48 1128,1732 1165,1695 1460.13,1695 1465.99,1689.14 1465.99,1688.88 1476.87,1678 RVDD1.2
  other v1: 2089,56 2120.33,56 2089,87 2120.33,87 2089,118 2120.33,118 2089,147 2120.33,147 2089,178 2120.33,178 2089,209 2120.33,209 2089,240 2120.33,240 2089,271 2120.33,271 2089,302 2120.33,302 2089,333 2046,376 2014,377 1828,377.67 1859,377.67 1890,377.67 1921,377.67 1952,377.67 1983,377.67 1828,409 1859,409 1890,409 1921,409 1952,409 1983,409 2013,409 1827.29,440.7 1858.29,440.7 1889.29,440.7 1920.29,440.7 1951.29,440.7 1982.29,440.7 2225,893.67 2256,893.67 2287,893.67 2318,893.67 2163,894.67 2194,894.67 2225,925 2256,925 2287,925 2318,925 2163,926 2194,926 2227,1561 2258,1561 2289,1561 2320,1561 2165,1562 2196,1562 2227,1592.33 2258,1592.33 2289,1592.33 2320,1592.33 2165,1593.33 2196,1593.33 1080.74,1908.07
NetQ1_3: Q1.3 RBB6.2 RL6.2
NetQ2_3: Q2.3 RBB5.2 RL5.2
NetQ3_3: Q3.3 RBB4.2 RL4.2
NetQ4_3: Q4.3 RBB3.2 RL3.2
NetQ5_1: Q5.1 RCO2.2 | length 100.7
  Top Layer w10: Q5.1 1753.16,1034.63 1767.87,1049.34 RCO2.2
NetQ5_2: Q5.2 RCO1.2 | length 169.4
  Top Layer w10: Q5.2 1709.14,1113.37 1715,1119.23 1715,1189.14 1720.86,1195 RCO1.2@1769,1195
NetQ6_3: Q6.3 RBB2.2 RL2.2
NetQ7_3: Q7.3 RBB1.2 RL1.2
NetQ8_1: Q8.1 RDO1.1 | length 986.3
  Top Layer w10: Q8.1 1195.86,395.36 1190,401.22 1190,864.14 1315.86,990 1440,990 1524,1074 RDO1.1
NetQ8_9: Q8.9 Q9.9
  other v1: 1616,68.97 1647,68.97 1678,68.97 1709,68.97 1616,104.75 1647,104.75 1678,104.75 1709,104.75 1616,140.53 1647,140.53 1678,140.53 1709,140.53 1616,176.31 1647,176.31 1678,176.31 1709,176.31 1616,212.08 1647,212.08 1678,212.08 1709,212.08 1616,247.86 1647,247.86 1678,247.86 1709,247.86 1616,283.64 1647,283.64 1678,283.64 1709,283.64 1616,317 1647,317 1678,317 1709,317 1616,348.33 1647,348.33 1678,348.33 1709,348.33 1616,379.67 1647,379.67 1678,379.67 1709,379.67 1616,411 1647,411 1678,411 1709,411 1335,529.97 1366,529.97 1397,529.97 1428,529.97 1335,565.75 1366,565.75 1397,565.75 1428,565.75 1335,601.53 1366,601.53 1397,601.53 1428,601.53 1335,637.31 1366,637.31 1397,637.31 1428,637.31 1335,673.08 1366,673.08 1397,673.08 1428,673.08 1335,708.86 1366,708.86 1397,708.86 1428,708.86 1335,744.64 1366,744.64 1397,744.64 1428,744.64 1335,778 1366,778 1397,778 1428,778 1335,809.33 1366,809.33 1397,809.33 1428,809.33 1335,840.67 1366,840.67 1397,840.67 1428,840.67 1335,872 1366,872 1397,872 1428,872
NetQ9_2: Q9.2 Q9.3 Q9.4 Q9.5 Q9.6 Q9.7 Q9.8 RCO3.1 RVM1.1 U4.4 U5.4 | length 476.1
  Top Layer w10: RVM1.1 1847,1173.68 RCO3.1 2055.66,1022.66 v1(2131,1098) ; RVM1.1@1850,1170.68 RVM1.1@1855,1175.68
  other v1: 2162,378.67 2193,378.67 2224,378.67 2255,378.67 2286,378.67 2317,378.67 2162,410 2193,410 2224,410 2255,410 2286,410 2317,410 2126,444 2157.33,444 2126,475 2157.33,475 2126,506 2157.33,506 2126,537 2157.33,537 2127,568 2158.33,568 2127,599 2158.33,599 2262,999.67 2293,999.67 2323,999.67 2138,1000.67 2169,1000.67 2200,1000.67 2231,1000.67 2262,1030.67 2293,1030.67 2323,1030.67 2138,1031.67 2169,1031.67 2200,1031.67 2231,1031.67 2262,1062 2293,1062 2323,1062 2138,1063 2169,1063 2200,1063 2231,1063 2162.33,1098 2131,1129 2162.33,1129 2131,1160 2162.33,1160 2131,1191 2162.33,1191 2132,1222 2163.33,1222 2132,1253 2163.33,1253
NetR15_1: R15.1 U3.16 | length 209.3
  Top Layer w10: U3.16 1817.91,1338.5 R15.1
NetRCO1_1: RCO1.1 U3.14 | length 186.6
  Top Layer w10: U3.14 1763.14,1288.5 1769,1282.64 RCO1.1
NetRCOT1_1: RCOT1.1 U3.19 | length 212.5
  Top Layer w10: U3.19 1728.5,1413.5 1774.85,1459.85 1774.85,1478.51 RCOT1.1
NetRCOT1_2: RCOT1.2 RDOT1.2 RUT1.2 U1.1 U2.6 | length 3174.5
  Top Layer w20: U2.6@224.2,1176.57 98.43,1176.57 35,1240 35,1550 85,1600 178,1600 260,1682 260,1855 345,1940 1365,1940 1410.61,1894.4 U1.1 1606.78,1751.78 1665,1810 1830.94,1810 1842.66,1798.28 RDOT1.2 ; RUT1.2@1840,1410.23 1840,1486 RDOT1.2@1840,1557
NetRDO1_2: RDO1.2 U3.13 | length 280
  Top Layer w10: RDO1.2 1633.66,1163.66 1675,1205 1675,1245 1656.5,1263.5 U3.13
NetRDOT1_1: RDOT1.1 U3.20 | length 229.7
  Top Layer w10: U3.20 1678.5,1438.5 1773.12,1533.12 1773.12,1546.78 RDOT1.1
NetRUT1_1: RUT1.1 U3.18 | length 206.7
  Top Layer w10: U3.18 1639.76,1388.5 1648.26,1380 1776.48,1380 1782.34,1385.86 RUT1.1
NetRVM1_2: RVM1.2 U3.15 | length 267.4
  Top Layer w10: U3.15 1766.5,1313.5 1799.75,1280.25 1799.75,1279.12 1843.87,1235 RVM1.2
pads on no net: U1.3 U1.4 U2.8 U2.9 U3.2 U3.17 U3.22 U3.23 U3.24 U4.1 U4.2 U5.1 U5.2

## Polygon pours and split planes (outlines as drawn)
GND on Top Layer "GND_L01_P025" (solid, remove dead copper, pour order 25): 1141.5,1620 1142.5,1621 1239,1621 1240,1620 1240,1586.5 1238,1585 1143,1585 1141.5,1586.5
NetLED2_1 on Top Layer "NETLED2_1_L01_P000" (solid, remove dead copper, pour order 0): 578,1696 587,1687 587,1555.33 578.5,1544 443.17,1544 436,1552.6 436,1688.8 445,1696
NetLED1_1 on Top Layer "NETLED1_1_L01_P001" (solid, remove dead copper, pour order 1): 615,1923.5 624,1914.5 624,1796.5 615,1784.5 494,1784.5 484,1796.5 484,1915.5 494,1923.5
NetLED3_1 on Top Layer "NETLED3_1_L01_P003" (solid, remove dead copper, pour order 3): 576.27,1465.67 585.27,1456.67 585.27,1325.01 576.77,1313.67 441.44,1313.67 434.27,1322.27 434.27,1458.47 443.27,1465.67
NetLED4_1 on Top Layer "NETLED4_1_L01_P005" (solid, remove dead copper, pour order 5): 580.27,1231.67 589.27,1222.67 589.27,1091.01 580.77,1079.67 445.44,1079.67 438.27,1088.27 438.27,1224.47 447.27,1231.67
NetLED5_1 on Top Layer "NETLED5_1_L01_P006" (solid, remove dead copper, pour order 6): 577.27,1002.67 586.27,993.67 586.27,862.01 577.77,850.67 442.44,850.67 435.27,859.27 435.27,995.47 444.27,1002.67
NetQ7_3 on Top Layer "NETQ7_3_L01_P009" (solid, remove dead copper, pour order 9): 895,765 900,760 900,620 895,615 839,615 825,601 825,555 820,550 787,550 783,554 783,601 769,615 760,615 755,620 755,762 758,765 769,765
NetQ6_3 on Top Layer "NETQ6_3_L01_P010" (solid, remove dead copper, pour order 10): 894,997 899,992 899,852 894,847 838,847 824,833 824,787 819,782 786,782 782,786 782,833 768,847 759,847 754,852 754,994 757,997 768,997
NetQ4_3 on Top Layer "NETQ4_3_L01_P011" (solid, remove dead copper, pour order 11): 895,1230 900,1225 900,1085 895,1080 839,1080 825,1066 825,1020 820,1015 787,1015 783,1019 783,1066 769,1080 760,1080 755,1085 755,1227 758,1230 769,1230
NetQ3_3 on Top Layer "NETQ3_3_L01_P012" (solid, remove dead copper, pour order 12): 894,1460 899,1455 899,1315 894,1310 838,1310 824,1296 824,1250 819,1245 786,1245 782,1249 782,1296 768,1310 759,1310 754,1315 754,1457 757,1460 768,1460
NetQ2_3 on Top Layer "NETQ2_3_L01_P013" (solid, remove dead copper, pour order 13): 894,1694 899,1689 899,1549 894,1544 838,1544 824,1530 824,1484 819,1479 786,1479 782,1483 782,1530 768,1544 759,1544 754,1549 754,1691 757,1694 768,1694
NetQ1_3 on Top Layer "NETQ1_3_L01_P014" (solid, remove dead copper, pour order 14): 893,1924 898,1919 898,1779 893,1774 837,1774 823,1760 823,1714 818,1709 785,1709 781,1713 781,1760 767,1774 758,1774 753,1779 753,1921 756,1924 767,1924
NetCSR1_1 on Top Layer "NETCSR1_1_L01_P015" (solid, remove dead copper, pour order 15): 752,510 758,516 905,516 925,496 925,388 943,370 1315,370 1320,365 1320,48 1319,48 1315,44 761,44 752.5,52.5
NetLED5_1 on Top Layer "NETLED5_1_L01_P016" (solid, remove dead copper, pour order 16): 936,715 936,710 942,704 1060,704 1067,711 1067,835 1062,840 941,840 937,836
NetLED4_1 on Top Layer "NETLED4_1_L01_P017" (solid, remove dead copper, pour order 17): 935,948 935,943 941,937 1059,937 1066,944 1066,1068 1061,1073 940,1073 936,1069
NetLED3_1 on Top Layer "NETLED3_1_L01_P018" (solid, remove dead copper, pour order 18): 933,1180 933,1175 939,1169 1057,1169 1064,1176 1064,1300 1059,1305 938,1305 934,1301
NetLED2_1 on Top Layer "NETLED2_1_L01_P019" (solid, remove dead copper, pour order 19): 934,1412 934,1407 940,1401 1058,1401 1065,1408 1065,1532 1060,1537 939,1537 935,1533
NetLED1_1 on Top Layer "NETLED1_1_L01_P020" (solid, remove dead copper, pour order 20): 934,1645 934,1640 940,1634 1058,1634 1065,1641 1065,1765 1060,1770 939,1770 935,1766
NetQ1_2 on Top Layer "NETQ1_2_L01_P021" (solid, remove dead copper, pour order 21): 938,1917 942,1921 1094,1921 1100,1915 1100,1869 1095,1864 943,1864 938,1869
GND on Top Layer "GND_L01_P022" (solid, remove dead copper, pour order 22): 1325,1815 1381,1815 1383,1813 1383,1718 1381,1716 1325,1716 1323,1718 1323,1813
GND on Top Layer "GND_L01_P023" (solid, remove dead copper, pour order 23): 1569,1694 1570,1695 1665,1695 1667,1694 1667,1661 1665,1660 1571,1660 1569,1662
GND on Top Layer "GND_L01_P024" (solid, remove dead copper, pour order 24): 1800,1774 1802,1772 1802,1680 1800,1676 1767,1676 1766,1678 1766,1772 1768,1774
GND on Top Layer "GND_L01_P026" (solid, remove dead copper, pour order 26): 1141,1542 1143,1544 1238,1544 1239.5,1542.5 1239.5,1508.5 1237.5,1507 1142.5,1507 1141,1508.5
GND on Top Layer "GND_L01_P027" (solid, remove dead copper, pour order 27): 1141,1465 1143,1467 1238,1467 1239.5,1465.5 1239.5,1431.5 1237.5,1430 1142.5,1430 1141,1431.5
GND on Top Layer "GND_L01_P028" (solid, remove dead copper, pour order 28): 1141,1387 1143,1389 1238,1389 1239.5,1387.5 1239.5,1353.5 1237.5,1352 1142.5,1352 1141,1353.5
GND on Top Layer "GND_L01_P029" (solid, remove dead copper, pour order 29): 1141,1310 1143,1312 1238,1312 1239.5,1310.5 1239.5,1276.5 1237.5,1275 1142.5,1275 1141,1276.5
GND on Top Layer "GND_L01_P030" (solid, remove dead copper, pour order 30): 1141,1232 1143,1234 1238,1234 1239.5,1232.5 1239.5,1198.5 1237.5,1197 1142.5,1197 1141,1198.5
GND on Top Layer "GND_L01_P032" (solid, remove dead copper, pour order 32): 1345.68,1127.03 1401.68,1127.03 1405,1123.71 1405,1054.26 1399.31,1047 1346.69,1047 1343.68,1053.04 1343.68,1125.03
NetQ8_9 on Top Layer "NETQ8_9_L01_P033" (solid, remove dead copper, pour order 33): 1738,29.5 1372,29.5 1352,45.5 1352,415.5 1255,512.5 1255,860 1300.5,905.5 1735.57,905.5 1737.98,901.28
GND on Top Layer "GND_L01_P034" (solid, remove dead copper, pour order 34): 1734,1162 1788,1162 1792,1158 1792,1092 1790,1090 1789,1090 1734,1090 1731,1093 1731,1159
GND on Top Layer "GND_L01_P035" (solid, remove dead copper, pour order 35): 1862,1366.8 1864,1368 1905,1368 1914,1377 1932,1377 1937,1372 1937,1319 1931,1313 1912,1313 1911,1314 1864,1314 1862,1315.2
NetQ9_2 on Top Layer "NETQ9_2_L01_P038" (solid, remove dead copper, pour order 38): 1891,898 1901,907 1901,1269 1932,1300 2349,1300 2349,979 2143,979 2110,946 2110,682 2144,648 2347,648 2347,379 2348,378 2347,377 2347,349 2129,349 1940,564 1795,564 1778,581 1779,582 1779,885 1780,885 1793,898
NetQ1_2 on Top Layer "NETQ1_2_L01_P040" (solid, remove dead copper, pour order 40): 2348,959 2348,667 2347,668 2143,668 2125,686 2127,688 2127,943 2128,943 2144,959 2349,959
NetQ1_2 on Top Layer "NETQ1_2_L01_P041" (solid, remove dead copper, pour order 41): 2348,1618 2348,1326 2347,1327 2143,1327 2125,1345 2127,1347 2127,1602 2128,1602 2144,1618 2349,1618
GND on Top Layer "GND_L01_P042" (solid, remove dead copper, pour order 42): 180,1142 186,1148 186,1149 267,1149 275,1141 275,1077 269,1071 185,1071 180,1076
GND on Top Layer "GND_L01_P043" (solid, remove dead copper, pour order 43): 624,764 625,763 625,55 615,45 280,45 230,70 230,220 80,340 80,765 95,780 605,780
NetQ1_2 on Top Layer "NETQ1_2_L01_P061" (solid, remove dead copper, pour order 61): 1996,477 2152,307 2152,56 2127,31 1833,31 1800,64 1800,466 1811,477 1957,477
GND on Bottom Layer "GND_L02_P060" (solid, remove dead copper, pour order 60): 2192.5,205 2150,162.5 2150,45 432.5,45 225,252.5 25,252.5 25,1737.5 180,1737.5 180,1742.5 240,1802.5 240.01,1948.22 1968.22,1951.78 2192.5,1727.5
NetLED5_1 on Bottom Layer "NETLED5_1_L02_P059" (solid, remove dead copper, pour order 59): 436,996.43 436,857 446,847 926,847 936,837 936,776 943,769 1060,769 1066,775 1066,895 1058,903 554,903 526,931 526,994 517.67,1002.33 444.83,1002.74
NetLED4_1 on Bottom Layer "NETLED4_1_L02_P058" (solid, remove dead copper, pour order 58): 436,1225.43 436,1086 446,1076 926,1076 936,1066 936,1005 943,998 1060,998 1066,1004 1066,1124 1058,1132 554,1132 526,1160 526,1223 517.67,1231.33 444.83,1231.74
NetLED3_1 on Bottom Layer "NETLED3_1_L02_P057" (solid, remove dead copper, pour order 57): 434,1458.43 434,1319 444,1309 924,1309 934,1299 934,1238 941,1231 1058,1231 1064,1237 1064,1357 1056,1365 552,1365 524,1393 524,1456 514.2,1465.8 444.87,1466.19
NetLED1_1 on Bottom Layer "NETLED1_1_L02_P055" (solid, remove dead copper, pour order 55): 477,1921.45 477,1787.53 483.07,1782 896,1782 919,1759 919,1719 949,1689 1064,1689 1064,1690 1077,1703 1077,1830 1063,1844 666,1844 638,1872 638,1917 628.03,1926.97 483.07,1926.97
NetLED2_1 on Bottom Layer "NETLED2_1_L02_P056" (solid, remove dead copper, pour order 56): 435,1692.43 435,1553 445,1543 925,1543 935,1533 935,1472 942,1465 1059,1465 1065,1471 1065,1591 1057,1599 553,1599 525,1627 525,1690 516.67,1698.33 443.83,1698.74
NetQ1_2 on Bottom Layer "NETQ1_2_L02_P054" (solid, remove dead copper, pour order 54): 1937,1858 1955,1840 1955,1605 1962,1598 2051,1598 2051,1858 1990,1919 1108,1919 1101,1926 940,1926 933,1919 933,1859 940,1851 1101,1851 1108.88,1858
NetQ8_9 on Bottom Layer "NETQ8_9_L02_P053" (solid, remove dead copper, pour order 53): 1739,27.5 1373,27.5 1353,43.5 1353,413.5 1256,510.5 1256,858 1301.5,903.5 1736.57,903.5 1738.98,899.28
NetQ9_2 on Bottom Layer "Bottom Layer-NetQ9_2" (solid, remove dead copper, pour order 50): 2347,349 2347,648 2125,648 2106,629 2106,384 2141,349
NetQ9_2 on Bottom Layer "NETQ9_2_L02_P046" (solid, remove dead copper, pour order 46): 2135,1300 2350,1300 2350,980 2135,980 2110,1005 2110,1275
NetQ1_2 on Bottom Layer "NETQ1_2_L02_P045" (solid, remove dead copper, pour order 45): 2350,1325 2350,1620 1970,1620 1955,1605 1955,1300 1800,1145 1800,65 1835,30 2035,30 2125,30 2155,60 2155,170 2160,170 2190,200 2335,200 2345,210 2345,330 2335,340 2125,340 2095,375 2095,645 2117,667 2350,667 2350,960 2125,960 2100,985 2100,1295 2130,1325

## Silkscreen, mask and mechanical layers (free items; w line width, h text height)
Top Overlay:
  circle w10: c116.61,118.11 r118.11
  circle w10: c2243.89,117.61 r118.11
  circle w10: c2246.39,1849.89 r118.11
  circle w10: c118.11,1850.39 r118.11
  region: 1618,1871.5 1618,1804.5 1577.5,1836.5
  text "BMS-6S-1B" at 1934,1936 h40 r180
  text "BTSP" at 1706,1853 h20 r180
  text "B5" at 412,1823 h40 r90
  text "B4" at 412,1591 h40 r90
  text "B3" at 412,1366 h40 r90
  text "B2" at 412,1122 h40 r90
  text "Port" at 53,957 h20 r270
  text "Balancing" at 112.5,957 h20 r270
  text "Battery" at 178.66,957 h20 r270
  text "B1" at 412,901 h40 r90
  text "B-" at 285,228 h40
  text "B+" at 1750,29 h40
Bottom Overlay:
  text "FRPB-BMS-6S-1B" at 1969,1800 h120
Top Solder:
  region: 2011,1261.25 2068,1261.25 2067,1260.25 2067,575 2011,575
  region: 1925,1261.25 1982,1261.25 1981,1260.25 1981,578 1925,578
Mechanical 1:
  lines w10: 0,118.11 0,1850.39 ; 0.18,118.99 ccw(c118.11,118.11) 123.98,0.33 ; 0.33,1845.52 cw(c118.11,1851.39) 118.99,1969.32 ; 69,983 69.25,983.25 ; 118.11,0 2244.09,0 ; 118.11,1968.5 2244.09,1968.5 ; 237,983.25 237.75,984 ; 2239.22,1968.18 cw(c2245.09,1850.39) 2363.02,1849.51 ; 2243.21,-0.82 ccw(c2244.09,117.11) 2361.88,122.98 ; 2362,132 2362.2,131.8 ; 2363,118.11 2363,1850.39

## Dimensions
118.11,1850.39 to 55,1850 on Mechanical 6
118.11,1850.39 to 0,1850.39 on Mechanical 6
0,1968.5 to 2362.2,1968.5 on Mechanical 6
0,0 to 118.11,1968.5 on Mechanical 6